# Altium PCB BMduino_test.PcbDoc
Units mil, origin at the board's own origin, x right, y up, seen from the top; angles counter-clockwise.
Board outline 2540 x 2100 mil, 2 copper layers (Top Layer, Bottom Layer); 34 components, 32 nets, 164 pads, 41 vias.
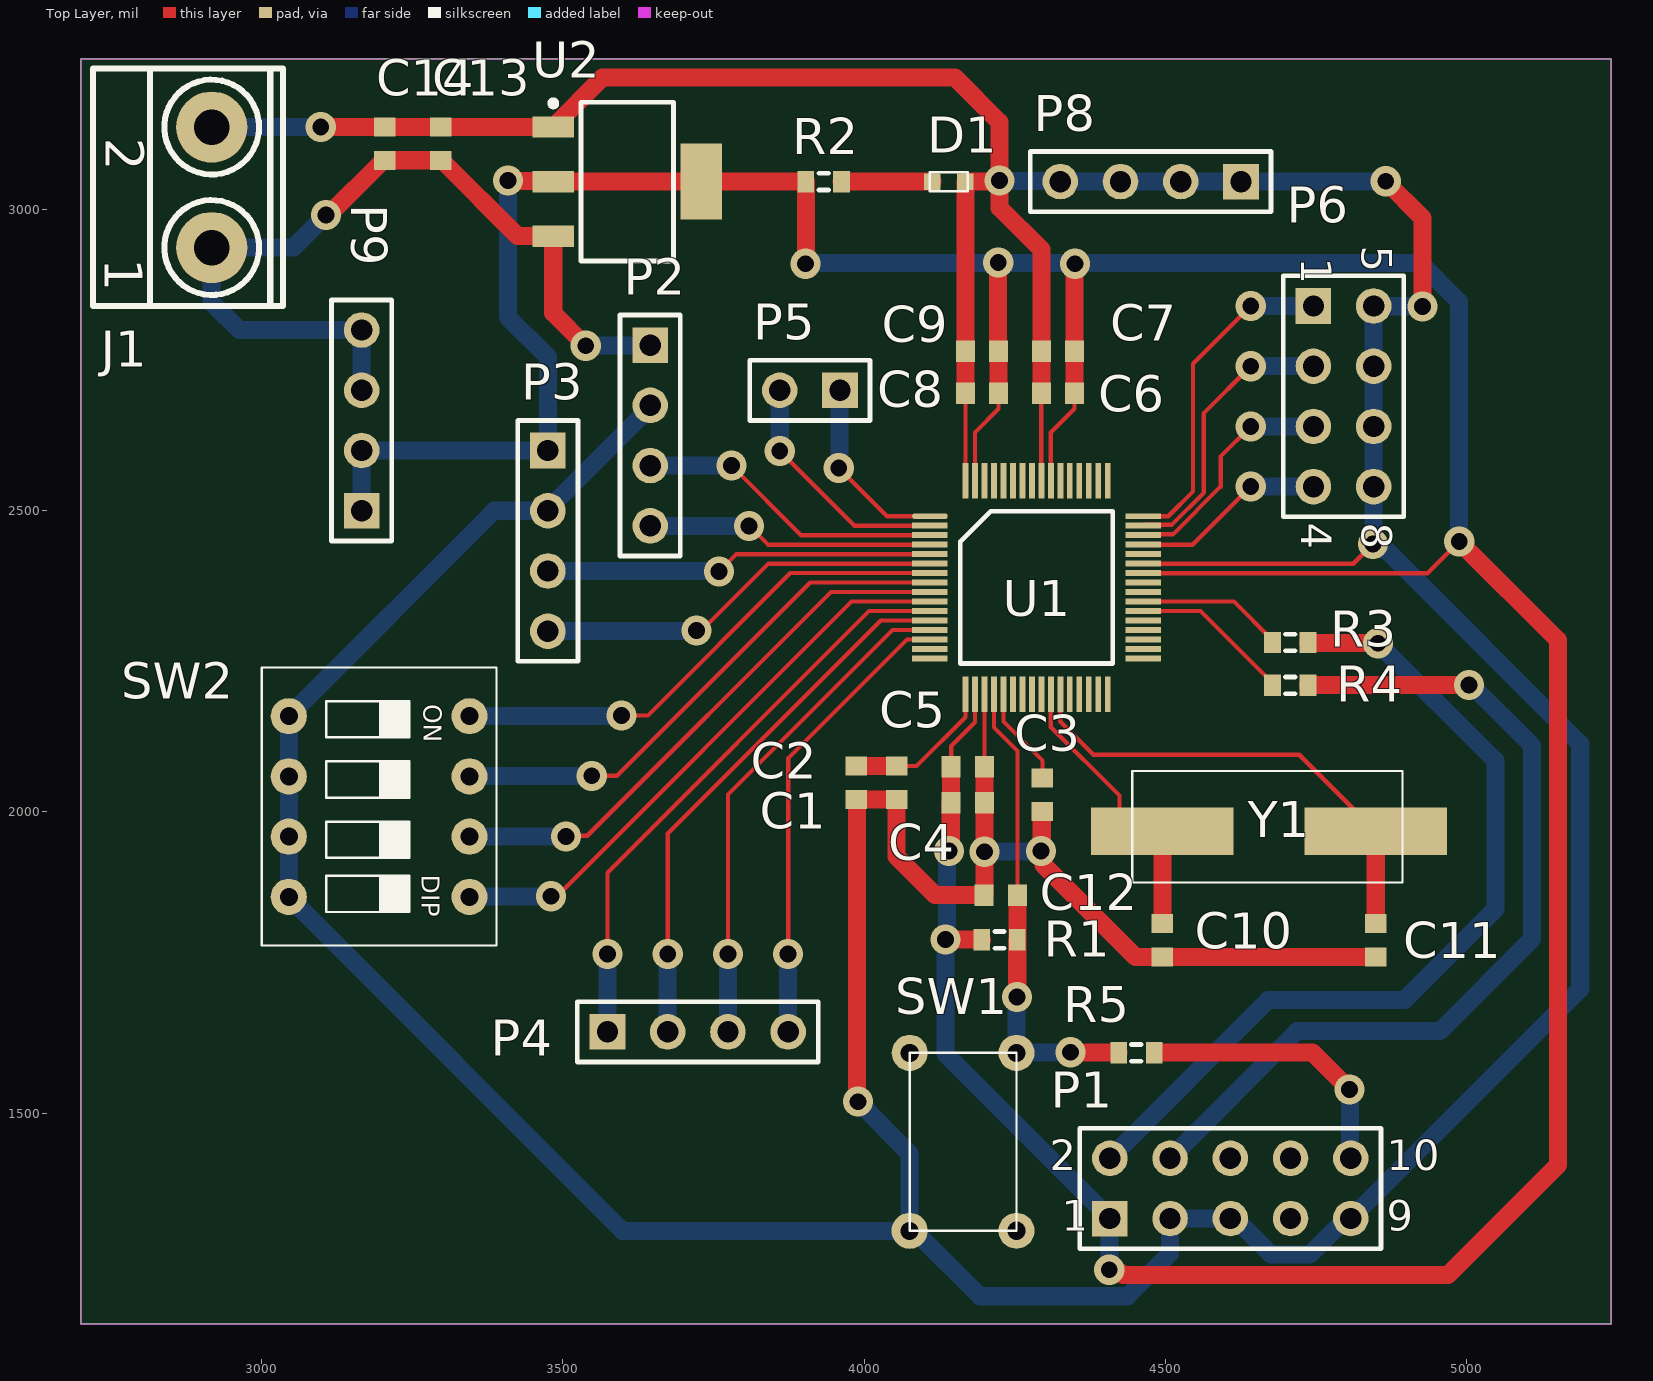
[diagram p0: Top Layer view]
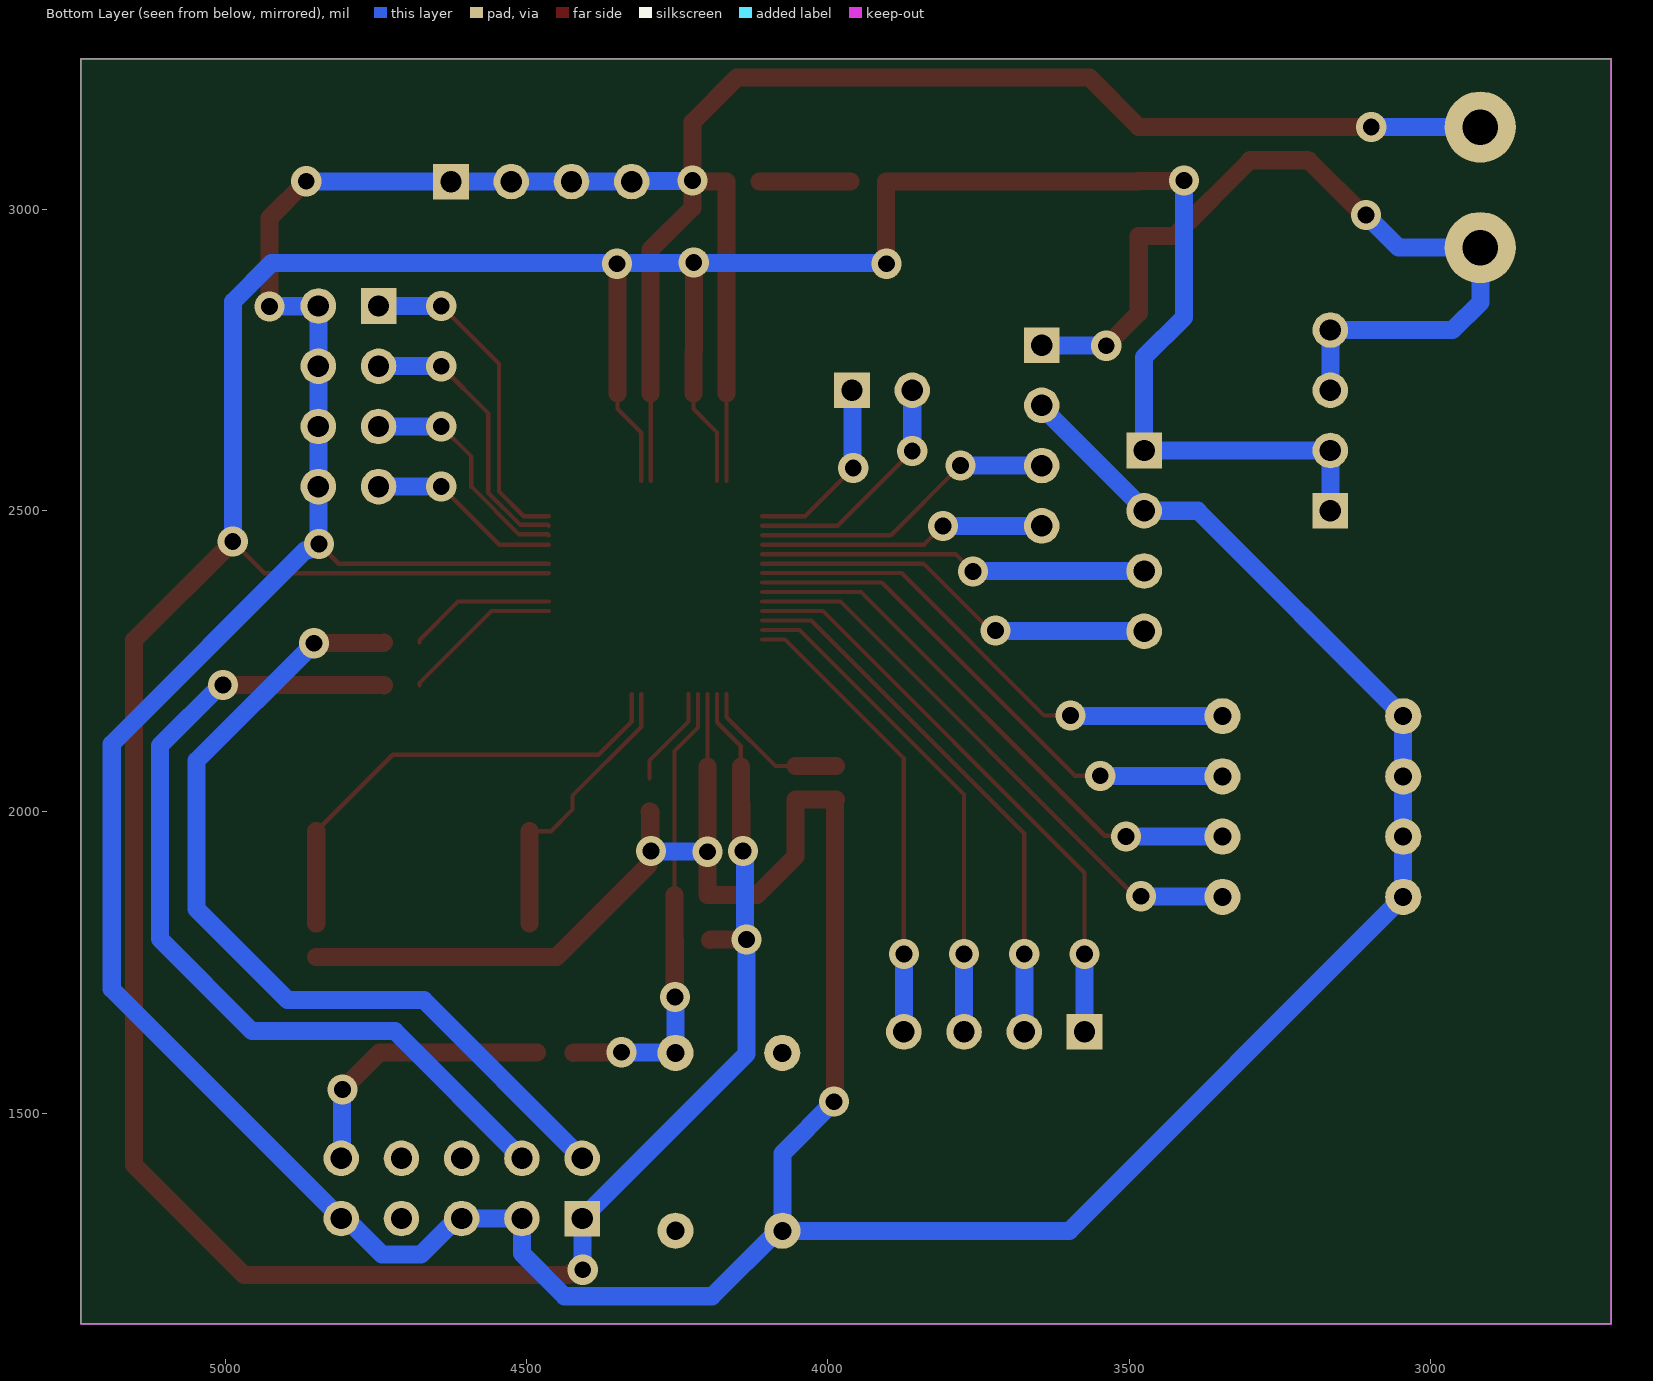
[diagram p1: Bottom Layer view, seen from below]

## Layer stack, top to bottom
Top Solder: solder mask 0.4, Solder Resist, Dk 3.5
Top Layer: signal copper 1.4
Dielectric 1: dielectric 12.6, FR-4, Dk 4.8
Bottom Layer: signal copper 1.4
Bottom Solder: solder mask 0.4, Solder Resist, Dk 3.5

## Board outline
2700,1150 2700,3250 5240,3250 5240,1150

## Design rules (kind name [scope] priority, off if disabled: settings)
Clearance [All] p1: gap=4 ignorepadtopadclearanceinfootprint=FALSE
PolygonConnect [All] p1: connectstyle=Relief reliefconductorwidth=10 reliefentries=4 polygonreliefangle="90 Angle" airgapwidth=10
RoutingVias [All] p1: holewidth=28 width=50 viastyle="Through Hole" minholewidth=28 minwidth=50 maxholewidth=28 maxwidth=50
SolderMaskExpansion [All] p1: expansion=4 istentingtop=FALSE
Width [All] p1: maxlimit=30 minlimit=7 preferedwidth=10 minimp=50.000000 maximp=50.000000 favimp=50.000000
30 further rules are at their usual default settings.

## Components (designator, comment, footprint, x,y, rotation, side; value= is the part's Value field where it differs from the comment)
C1 "Cap Semi" 1608[0603] 4054,2048.56 r270 top value=2.2uF
C2 "Cap Semi" 1608[0603] 3987,2048.56 r90 top value=0.1uF
C3 "Cap Semi" 1608[0603] 4296,2028.44 r90 top value=0.1uF
C4 "Cap Semi" 1608[0603] 4172.2,2015 r0 top value=2.2uF
C5 "Cap Semi" 1608[0603] 4172.2,2075 r180 top value=0.1uF
C6 "Cap Semi" 1608[0603] 4321.81,2695 r180 top value=2.2uF
C7 "Cap Semi" 1608[0603] 4321.81,2765 r0 top value=0.1uF
C8 "Cap Semi" 1608[0603] 4195.83,2695 r180 top value=2.2uF
C9 "Cap Semi" 1608[0603] 4195.83,2765 r0 top value=0.1uF
C10 "Cap Semi" 1608[0603] 4495.16,1787 r270 top value=12pF
C11 "Cap Semi" 1608[0603] 4849.49,1787 r90 top value=12pF
C12 "Cap Semi" 1608[0603] 4227,1862 r0 top value=0.01uF
C13 "Cap Semi" 1608[0603] 3297.03,3109.44 r90 top value=2.2uF
C14 "Cap Semi" 1608[0603] 3204.03,3109.44 r270 top value=0.1uF
D1 "green_light" LED_Green 4113.15,3046.45 r0 top
J1 "Terminal_Block" "terminal block" 3169.6,3117.5 r180 top
P1 "SW-DP" HDR2X5 4408,1325 r0 top
P2 "UART_5_test" HDR1X4 3645,2775 r270 top
P3 "UART_3.3_test" HDR1X4 3475,2600 r270 top
P4 "SPI_test" HDR1X4 3574,1635 r0 top
P5 "I2C_test" HDR1X2 3960,2700 r180 top
P6 "LED_test" HDR2X4_CEN 4746,2840 r270 top
P8 "GND" HDR1X4 4625.75,3046.45 r180 top
P9 "3.3V_5V" HDR1X4 3166,2500 r90 top
R1 "Res3" J1-0603 4225.03,1787.72 r0 top value=100
R2 "Res3" J1-0603 3933,3046.45 r0 top value=100
R3 "Res3" J1-0603 4707.53,2281.21 r180 top value=100
R4 "Res3" J1-0603 4707.53,2210.21 r180 top value=100
R5 "Res3" J1-0603 4452,1600 r180 top value=100
SW1 "BUTTON_DIP_4PIN" Push_Button 4075.83,1600 r270 top
SW2 "DIP_4_Switch" Switch_4 3045,2159 r270 top
U1 "HT32F52367" HT32H52367 4109.21,2490.94 r0 top
U2 "LM1117" "LM1117 - duplicate" 3607.03,3046.45 r0 top
Y1 "SMD_8MHz" Quartz-Crystal-8MHz 4505,1968 r0 top

## Footprints (in the part's own frame and the unit in brackets; to place one, negate y for a bottom-side part, rotate by r counter-clockwise, add the part's x,y. Pads: shape width x height; smd on the part's side, far side on the other; paste and mask are expansions set on the pad)
1608[0603] [mm] "Chip Capacitor, Body 1.6x0.8mm, IPC High Density"
  rect 0.8x0.9 smd: 1(-0.7,0) 2(0.7,0)
  body extent -0.87,-0.48 0.87,0.48, height 1.3
HDR1X2 [mm] "Connector; Header; 2 Position"
  rect 1.5x1.5 hole 0.9: 1(0,0)
  round 1.5 hole 0.9: 2(2.54,0)
  silkscreen extent -1.27,-1.27 3.81,1.27
HDR1X4 [mm] "Connector; Header; 4 Position"
  rect 1.5x1.5 hole 0.9: 1(0,0)
  round 1.5 hole 0.9: 2(2.54,0) 3(5.08,0) 4(7.62,0)
  silkscreen extent -1.27,-1.27 8.89,1.27
HDR2X4_CEN [mm] "Connector; Header; 4x2 Position"
  rect 1.5x1.5 hole 0.9: 1(0,0)
  round 1.5 hole 0.9: 2(2.54,0) 3(5.08,0) 4(7.62,0) 5(0,2.54) 6(2.54,2.54) 7(5.08,2.54) 8(7.62,2.54)
  silkscreen extent -1.27,-1.27 8.89,3.81
HDR2X5 [mm] "Connector; Header; 5x2 Position"
  rect 1.5x1.5 hole 0.9: 1(0,0)
  round 1.5 hole 0.9: 2(0,2.54) 3(2.54,0) 4(2.54,2.54) 5(5.08,0) 6(5.08,2.54) 7(7.62,0) 8(7.62,2.54) 9(10.16,0) 10(10.16,2.54)
  silkscreen extent -1.27,-1.27 11.43,3.81
HT32H52367 [mm] "HT32H52367"
  oval 1.5x0.25 smd: 1(0,0)
  rect 1.5x0.25 smd: 2(0,-0.4) 3(0,-0.8) 4(0,-1.2) 5(0,-1.6) 6(0,-2) 7(0,-2.4) 8(0,-2.8) 9(0,-3.2) 10(0,-3.6) 11(0,-4) 12(0,-4.4) 13(0,-4.8) 14(0,-5.2) 15(0,-5.6) 16(0,-6) 33(9,-6) 34(9,-5.6) 35(9,-5.2) 36(9,-4.8) 37(9,-4.4) 38(9,-4) 39(9,-3.6) 40(9,-3.2) 41(9,-2.8) 42(9,-2.4) 43(9,-2) 44(9,-1.6) 45(9,-1.2) 46(9,-0.8) 47(9,-0.4) 48(9,0)
  rect 0.25x1.5 smd: 17(1.5,-7.5) 18(1.9,-7.5) 19(2.3,-7.5) 20(2.7,-7.5) 21(3.1,-7.5) 22(3.5,-7.5) 23(3.9,-7.5) 24(4.3,-7.5) 25(4.7,-7.5) 26(5.1,-7.5) 27(5.5,-7.5) 28(5.9,-7.5) 29(6.3,-7.5) 30(6.7,-7.5) 31(7.1,-7.5) 32(7.5,-7.5) 49(7.5,1.5) 50(7.1,1.5) 51(6.7,1.5) 52(6.3,1.5) 53(5.9,1.5) 54(5.5,1.5) 55(5.1,1.5) 56(4.7,1.5) 57(4.3,1.5) 58(3.9,1.5) 59(3.5,1.5) 60(3.1,1.5) 61(2.7,1.5) 62(2.3,1.5) 63(1.9,1.5) 64(1.5,1.5)
  silkscreen extent 1.28,-6.21 7.71,0.22
J1-0603 [mm] "Chip Resistor, Body 1.6x0.8mm, IPC High Density"
  rect 0.7x0.9 smd: 1(-0.75,0) 2(0.75,0)
  silkscreen extent -0.2,-0.35 0.2,0.35, body extent -0.85,-0.48 0.85,0.48, height 0.9
LED_Green [mm] "LED_0603"
  rect 0.7x0.7 smd: 1(0,0) 2(1.4,0)
  silkscreen extent -0.1,-0.4 1.5,0.4
"LM1117 - duplicate" [mm] "SOT223, 4-Leads, Body 6.50x7.00mm (avg), Pitch 2.30mm, IPC Medium Density"
  rect 1.75x0.9 smd: 1(-3.125,2.3) 2(-3.125,0) 3(-3.125,-2.3)
  rect 1.75x3.2 smd: 4(3.125,0)
  silkscreen extent -3.25,-3.35 1.95,3.42, body extent -1.85,-3.35 1.85,3.35, height 1.8
Push_Button [mil] "6*6"
  round 60 hole 30: 1(0,177.17) 2(0,0) 3(295.28,177.17) 4(295.37,-0.17)
  silkscreen extent 0,0 295,177
Quartz-Crystal-8MHz [mm] "Quartz-Crystal-8MHz"
  rect 6x2 smd: 1(-0.25,0) 2(8.75,0)
  silkscreen extent -1.52,-2.16 9.88,2.54
Switch_4 [mil] "DIP_4_Switch"
  round 60 hole 30: 1(0,300) 2(100,300) 3(200,300) 4(300,300) 5(0,0) 6(100,0) 7(200,0) 8(300,0)
  silkscreen extent -81,-45 381,345
"terminal block" [mm]
  round 3 hole 1.5 paste-2539.97 mask+0.051: 1(6.416,4.585) 2(6.416,-0.495)
  silkscreen extent 3.42,-2.96 11.42,7.04

## Part data
C1 C2 C3 C4 C5 C6 C7 C8 C9 C10 C11 C12 C13 C14: "Capacitor (Semiconductor SIM Model)", LatestRevisionDate=29-May-2009, LatestRevisionNote="IPC-7351 Footprint Added.", PackageDescription="Chip Capacitor", PackageReference=C1206, Published=8-Jun-2000, Publisher="Altium Limited"
D1: library part LED_Green
J1: library part "Terminal Block"
P1: library part "Header 5X2", "Header, 5-Pin, Dual row", LatestRevisionDate=17-Jul-2002, LatestRevisionNote="Re-released for DXP Platform.", Publisher="Altium Limited"
P2 P3 P4 P8 P9: library part "Header 4", "Header, 4-Pin", LatestRevisionDate=17-Jul-2002, LatestRevisionNote="Re-released for DXP Platform.", Publisher="Altium Limited"
P5: library part "Header 2", "Header, 2-Pin", LatestRevisionDate=17-Jul-2002, LatestRevisionNote="Re-released for DXP Platform.", Publisher="Altium Limited"
P6: library part "Header 4X2A", "Header, 4-Pin, Dual row", LatestRevisionDate=17-Jul-2002, LatestRevisionNote="Re-released for DXP Platform.", Publisher="Altium Limited"
R1 R2 R3 R4 R5: "Resistor", LatestRevisionDate=29-May-2009, LatestRevisionNote="IPC-7351 Footprint Added.", PackageDescription="Chip Resistor", PackageReference=J1-0603, Published=8-Jun-2000, Publisher="Altium Limited"
SW1: library part Push_Button
SW2: library part Switch_4
Y1: library part Quartz_Crystal_8MHz

## Via types
v1: diameter 50, hole 28, Top Layer to Bottom Layer, 41 vias

## Nets (pads, with @x,y where several pads share a name; then routed paths per layer and width w, separated by ;. In a path a pad name is that pad's centre, name@x,y a point inside that pad or via, vN(x,y) a via of type N, cw(c..) or ccw(c..) an arc to the next point about the centre after c; other vN are vias at no path point)
3.3V: C4.1 C5.2 C6.1 C7.2 C8.1 C9.2 P1.1 P3.1 P9.1 P9.2 R1.1 R2.1 U1.18 U1.42 U1.55 U1.63 U2.2 U2.4 | length 7409
  Top Layer w7: C5.2 4144.65,2109.65 4184.02,2149.02 U1.18 ; U1.63 4184.02,2630.02 4223.39,2669.39 C8.1 ; U1.55 4310,2630 4349.37,2669.37 C6.1 ; U1.42 4463.77,2396.23 4935.23,2396.23 v1(4988,2449)
  Top Layer w30: v1(3409,3048) 3409.78,3047.22 3483.22,3047.22 U2.2 U2.4 R2.1 3903.47,2910.47 v1(3903,2910) ; v1(4135,1788) 4195.22,1788 R1.1 ; v1(4141,1935) 4143.9,1937.9 4143.9,2014.25 C4.1 C5.2 ; v1(4222.69,2912.31) 4222.69,2765.69 C9.2 C8.1 ; C6.1 C7.2 4349.69,2765.31 4349.69,2909.69 v1(4350,2910) ; v1(4407,1240) 4410.83,1236.17 4424.97,1236.17 4430.14,1231 4969.43,1231 5152,1413.57 5152,2285 v1(4988,2449)
  Bottom Layer w30: P9.1 P9.2 P3.1 3475,2755 3409,2821 v1(3409,3048) ; v1@3902,2911 v1(3903,2910) 3904.15,2911.15 4221.54,2911.15 v1(4222.69,2912.31) 4223.85,2911.15 4348.85,2911.15 v1(4350,2910) 4351,2911 4924,2911 4988,2847 v1(4988,2449) ; v1(4141,1935) 4138,1932 4138,1791 v1(4135,1788) 4135,1598 P1.1 4407.5,1324.5 4407.5,1240.5 v1(4407,1240)
5V: C13.1 C14.2 J1.1 P2.1 P9.3 P9.4 U2.3 | length 1448.9
  Top Layer w30: v1(3107,2991) 3111.18,2991 3201.32,3081.13 3203.28,3081.13 C14.2 C13.1 C13.1@3299,3081.88 ; C13.1@3299.75,3081.13 3424.98,2955.9 U2.3 3484,2828 v1(3538,2774)
  Bottom Layer w30: v1(3107,2991) 3053,2937 J1.1 2917,2846 2963,2800 P9.4 P9.3 ; v1(3538,2774) 3538.5,2774.5 3644.5,2774.5 P2.1
CLDO: C1.1 C2.2 U1.17 | length 253.3
  Top Layer w7: C1.1 4087.12,2076.12 4168.26,2157.26 U1.17
  Top Layer w30: C2.2 C1.1
GND: C1.2 C2.1 C3.1 C4.2 C5.1 C6.2 C7.1 C8.2 C9.1 C10.2 C11.1 C12.1 C13.2 C14.1 D1.2 J1.2 P1.3 P1.5 P1.9 P2.2 P3.2 P6.5 P6.6 P6.7 P6.8 P8.1 P8.2 P8.3 P8.4 SW1.4 SW2.5 SW2.6 SW2.7 SW2.8 U1.19 U1.43 U1.56 U1.64 U2.1 | length 11239.7
  Top Layer w7: U1.64 C8.2 ; C5.1 U1.19 ; U1.56 C6.2 ; U1.43 4463.65,2412.1 4812.1,2412.1 v1(4845,2445)
  Top Layer w30: v1(3098,3137) C14.1 C13.2 U2.1 3566,3219 4151,3219 4225,3145 v1(4225,3048) ; v1(3990,1519) 3988.5,1520.5 3988.5,2020.25 3987.75,2021 C2.1 C1.2 4054,1926 4118,1862 C12.1 ; C8.2 C9.1 D1.2 4223.45,3046.45 v1(4225,3048) ; C12.1@4199.76,1862 C4.2 C5.1 ; C6.2 C7.1@4294.25,2766.97 ; C7.1 4294.25,2933.75 4225,3003 v1(4225,3048) ; C3.1 4295.75,2000.88 4295,2000.13 4295,1936 v1(4294,1935) 4297.83,1931.17 4297.83,1912.17 4450.56,1759.44 C10.2 C11.1 ; v1(4866,3047) 4927,2986 v1(4927,2839)
  Bottom Layer w30: J1.2 v1(3098,3137) ; P2.2 3645,2672.5 3475,2502.5 P3.2 3386,2500 SW2.5 SW2.6 SW2.7 SW2.8 3599.37,1304.63 SW1.4 ; v1(3990,1519) 4075.67,1433.33 SW1.4 ; v1(4200,1934) 4200.5,1934.5 4293.5,1934.5 v1(4294,1935) ; v1(4225,3048) 4225.78,3047.22 4324.97,3047.22 P8.4 P8.3 P8.2 P8.1 4626.02,3046.72 4865.72,3046.72 v1(4866,3047) ; v1(4927,2839) 4926.5,2839.5 4846.5,2839.5 P6.5 P6.6 P6.7 4846,2538 4845.5,2537.5 4845.5,2445.5 v1(4845,2445) 4850.41,2445 4860.41,2435 4867,2435 5189,2113 5189,1706 P1.9 4800.14,1325 4740.14,1265 4675.86,1265 4615.86,1325 P1.5 P1.3 4508,1267 4437,1196 4192.42,1196 4083.79,1304.63 SW1.4
GPIO_LED0: P6.4 U1.45 | length 322.3
  Top Layer w7: U1.45 4545.7,2443.7 v1(4642,2540)
  Bottom Layer w30: v1(4642,2540) P6.4
GPIO_LED1: P6.3 U1.46 | length 386.5
  Top Layer w7: U1.46 4464.96,2460.87 4512.87,2460.87 4592,2540 4592,2590 v1(4642,2640)
  Bottom Layer w30: v1(4642,2640) P6.3
GPIO_LED2: P6.2 U1.47 | length 469.5
  Top Layer w7: U1.47 4464.96,2476.62 4510.62,2476.62 4564.02,2530.02 4564.02,2662.02 v1(4642,2740)
  Bottom Layer w30: v1(4642,2740) P6.2
GPIO_LED3: P6.1 U1.48 | length 551.2
  Top Layer w7: U1.48 4504.95,2490.94 4546,2531.99 4546,2744 v1(4642,2840)
  Bottom Layer w30: v1(4642,2840) P6.1
GPIO_SW0: SW2.1 U1.7 | length 862.6
  Top Layer w7: v1(3597,2160) 3641,2160 3877.46,2396.46 U1.7
  Bottom Layer w30: SW2.1 3345.5,2159.5 3596.5,2159.5 v1(3597,2160)
GPIO_SW1: SW2.2 U1.8 | length 897.5
  Top Layer w7: v1(3548,2060) 3590,2060 3910.71,2380.71 U1.8
  Bottom Layer w30: SW2.2 3345.5,2059.5 3547.5,2059.5 v1(3548,2060)
GPIO_SW2: SW2.3 U1.9 | length 932.4
  Top Layer w7: v1(3505,1959) 3506.5,1960.5 3540.5,1960.5 3944.96,2364.96 U1.9
  Bottom Layer w30: SW2.3 v1(3505,1959)
GPIO_SW3: SW2.4 U1.10 | length 967.3
  Top Layer w7: v1(3480,1860) 3490,1860 3979.21,2349.21 U1.10
  Bottom Layer w30: SW2.4 3345.5,1859.5 3479.5,1859.5 v1(3480,1860)
I2C_SCL: P5.1 U1.1 | length 314.2
  Top Layer w7: v1(3958,2571) 4038.06,2490.94 U1.1
  Bottom Layer w30: v1(3958,2571) 3959,2572 3959,2699 P5.1
I2C_SDA: P5.2 U1.2 | length 401.5
  Top Layer w7: v1(3860,2599) 3983.8,2475.2 U1.2
  Bottom Layer w30: v1(3860,2599) P5.2
NetD1_1: D1.1 R2.2 | length 150.6
  Top Layer w30: R2.2 D1.1
NetP1_2: P1.2 R3.1 | length 1449.7
  Top Layer w30: R3.1 4737.66,2280.61 4852.39,2280.61 v1(4853,2280)
  Bottom Layer w30: P1.2 4671,1688 4897,1688 5048,1839 5048,2085 v1(4853,2280)
NetP1_4: P1.4 R4.1 | length 1486.9
  Top Layer w30: R4.1 4737.45,2210.61 5003.61,2210.61 v1(5004,2211)
  Bottom Layer w30: P1.4 4719,1636 4956,1636 5109,1789 5109,2110 5008,2211 v1(5004,2211)
NetP1_10: P1.10 R5.1 | length 463.6
  Top Layer w30: R5.1@4482.75,1600.5 4744.5,1600.5 v1(4806,1539)
  Bottom Layer w30: v1(4806,1539) 4807,1538 4807,1426 P1.10
nRST: C12.2 R1.2 R5.2 SW1.1 U1.20 | length 781.5
  Top Layer w7: U1.20 4215.51,2140.49 4254.82,2101.18 C12.2@4254.82,1864.7 ; C12.2@4254.56,1863 C12.2@4256.26,1864.7
  Top Layer w30: v1(4254.06,1693) 4254.31,1693.25 4254.31,1787.46 R1.2 C12.2 ; v1(4343,1601) 4343.5,1600.5 4421.97,1600.5 R5.2
  Bottom Layer w30: SW1.1 v1@4253,1693 ; SW1.1@4253.5,1600.5 4342.5,1600.5 v1(4343,1601)
SPI_MISO: P4.4 U1.14 | length 770.9
  Top Layer w7: v1(3874,1764) 3874,2089 4071.22,2286.22 U1.14
  Bottom Layer w30: P4.4 v1(3874,1764)
SPI_MOSI: P4.3 U1.13 | length 842.3
  Top Layer w7: v1(3774,1764) 3774,2029 4046.97,2301.97 U1.13
  Bottom Layer w30: P4.3 v1(3774,1764)
SPI_SCK: P4.2 U1.12 | length 910.7
  Top Layer w7: v1(3674,1764) 3674,1964 4027.72,2317.72 U1.12
  Bottom Layer w30: P4.2 v1(3674,1764)
SPI_SEL: P4.1 U1.11 | length 979.2
  Top Layer w7: v1(3574,1764) 3574,1899 4008.46,2333.46 U1.11
  Bottom Layer w30: P4.1 v1(3574,1764)
SWCLK_PA12: R4.2 U1.38 | length 267.8
  Top Layer w7: U1.38 4558.68,2333.46 4678,2214.15 R4.2
SWDIO_PA13: R3.2 U1.39 | length 244.9
  Top Layer w7: U1.39 4613.94,2349.21 4678,2285.15 R3.2
UART0_Rx: P2.4 U1.4 | length 477.2
  Top Layer w7: v1(3809,2475) 3840.3,2443.7 U1.4
  Bottom Layer w30: P2.4 v1(3809,2475)
UART0_Tx: P2.3 U1.3 | length 512.1
  Top Layer w7: v1(3780,2575) 3895.55,2459.45 U1.3
  Bottom Layer w30: P2.3 v1(3780,2575)
UART1_Rx: P3.4 U1.6 | length 680.7
  Top Layer w7: v1(3722,2301) 3730,2301 3841.2,2412.2 U1.6
  Bottom Layer w7: P3.4 P3.4@3475.5,2300.5 ; v1@3721.5,2300.5 v1(3722,2301)
  Bottom Layer w30: P3.4@3475.5,2300.5 v1@3721.5,2300.5
UART1_Tx: P3.3 U1.5 | length 646.6
  Top Layer w7: v1(3759,2399) 3787.95,2427.95 U1.5
  Bottom Layer w7: v1@3758,2400 v1(3759,2399)
  Bottom Layer w30: P3.3 v1@3758,2400
VBAT: C3.2 U1.21 | length 166.5
  Top Layer w7: U1.21 4231.26,2150.2 4296,2085.46 C3.2
XTALIN_PB13: C10.1 U1.26 Y1.1 | length 478.6
  Top Layer w7: U1.26 4310,2141 4423.87,2027.13 4423.87,2003.87 4459.74,1968 Y1.1
  Top Layer w30: C10.1 Y1.1
XTALOUT_PB14: C11.2 U1.27 Y1.2 | length 798.1
  Top Layer w7: U1.27 4325.75,2150.25 4381,2095 4722.49,2095 Y1.2
  Top Layer w30: C11.2 Y1.2
pads on no net: P1.6 P1.7 P1.8 SW1.2 SW1.3 U1.15 U1.16 U1.22 U1.23 U1.24 U1.25 U1.28 U1.29 U1.30 U1.31 U1.32 U1.33 U1.34 U1.35 U1.36 U1.37 U1.40 U1.41 U1.44 U1.49 U1.50 U1.51 U1.52 U1.53 U1.54 U1.57 U1.58 U1.59 U1.60 U1.61 U1.62

## Keep-outs
Keep-Out Layer:
  lines w3.94: 2700,1150 5240,1150 5240,3250 2700,3250 2700,1250 2700,1150

## Text inside footprints (layer, text, board x,y; h text height)
J1: Top Overlay "2" at 2740.8,3118.9 h62.99 r270; Top Overlay "1" at 2739.5,2919.3 h62.99 r270
P1: Top Overlay "10" at 4868,1405 h50; Top Overlay "9" at 4868,1305 h50; Top Overlay "1" at 4328,1305 h50; Top Overlay "2" at 4308,1405 h50
P6: Top Overlay "5" at 4826,2940 h50 r270; Top Overlay "1" at 4726,2920 h50 r270; Top Overlay "4" at 4726,2480 h50 r270; Top Overlay "8" at 4826,2480 h50 r270
SW2: Top Overlay "DIP" at 3266,1896 h30 r270; Top Overlay "ON" at 3269,2179 h30 r270